# Altium PCB MuMux V1R0.PcbDoc
Units mm, origin at the board's own origin, x right, y up, seen from the top; angles counter-clockwise.
Board outline 60 x 85 mm, 2 copper layers (Top Layer, Bottom Layer); 72 components, 72 nets, 240 pads, 63 vias.
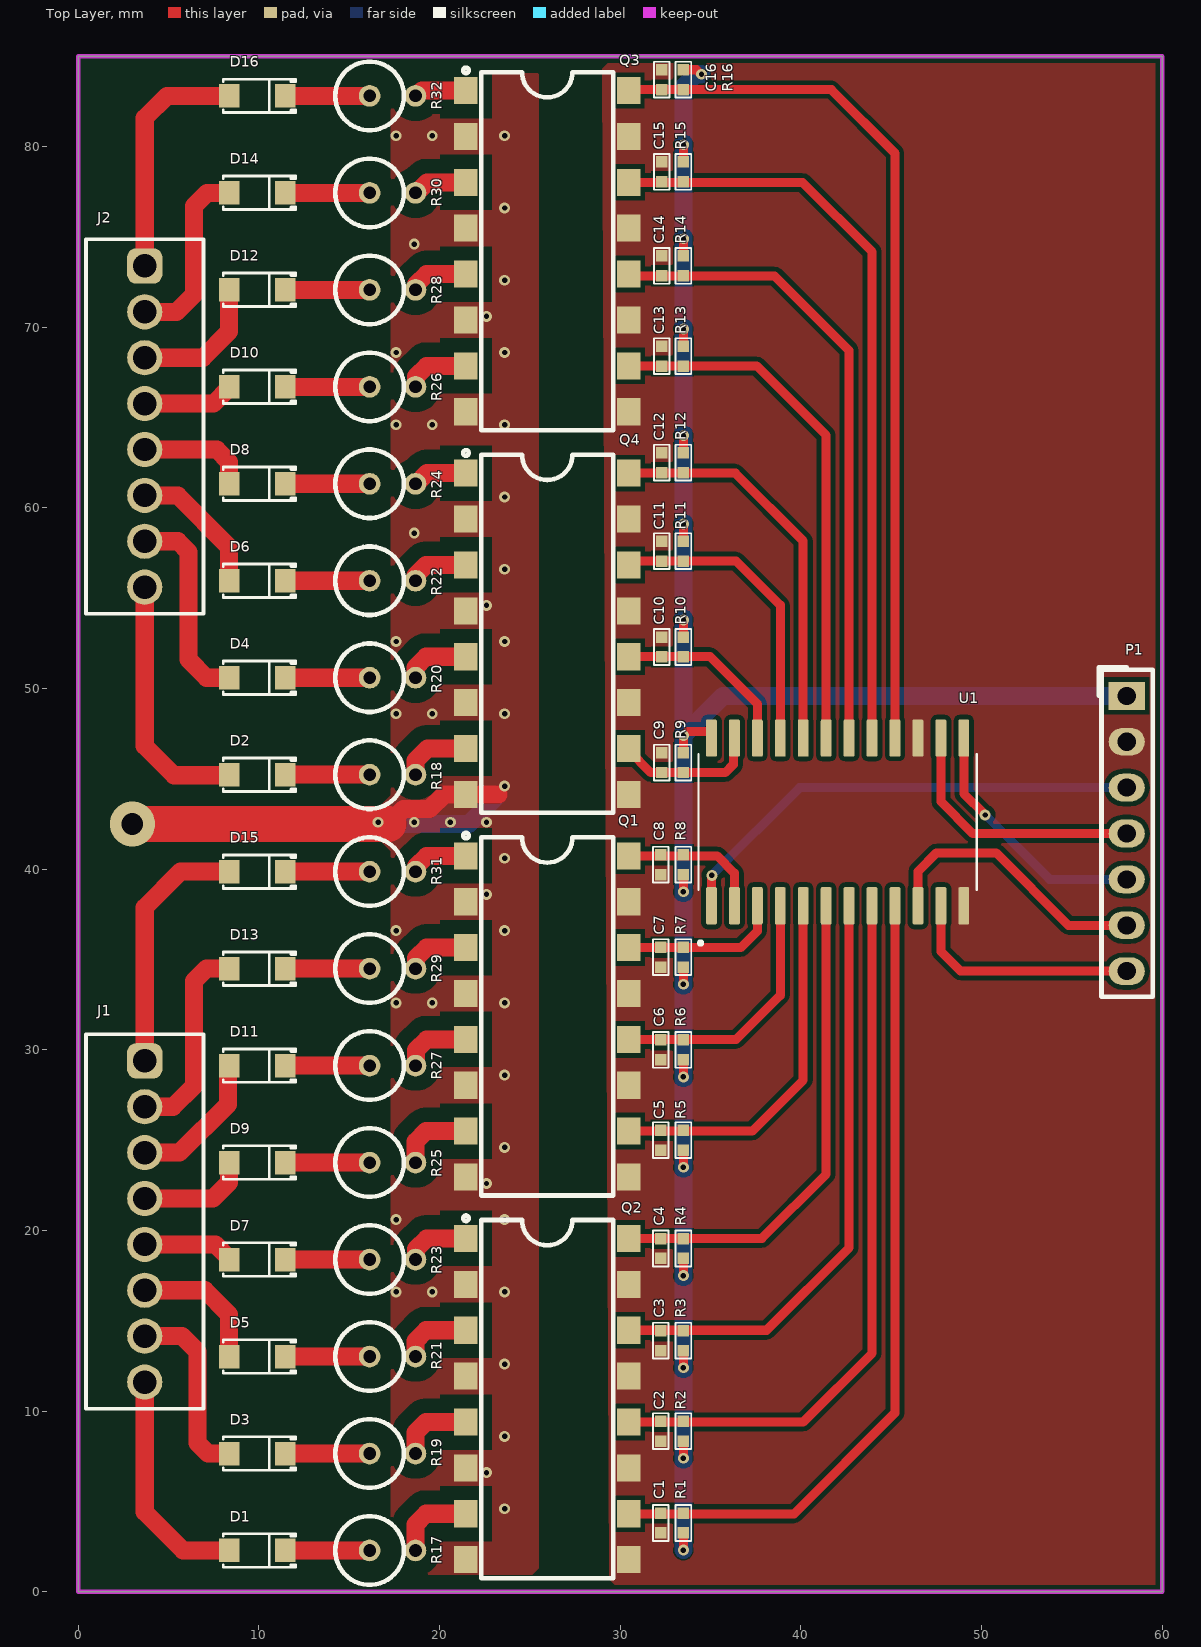
[diagram p0: Top Layer view]
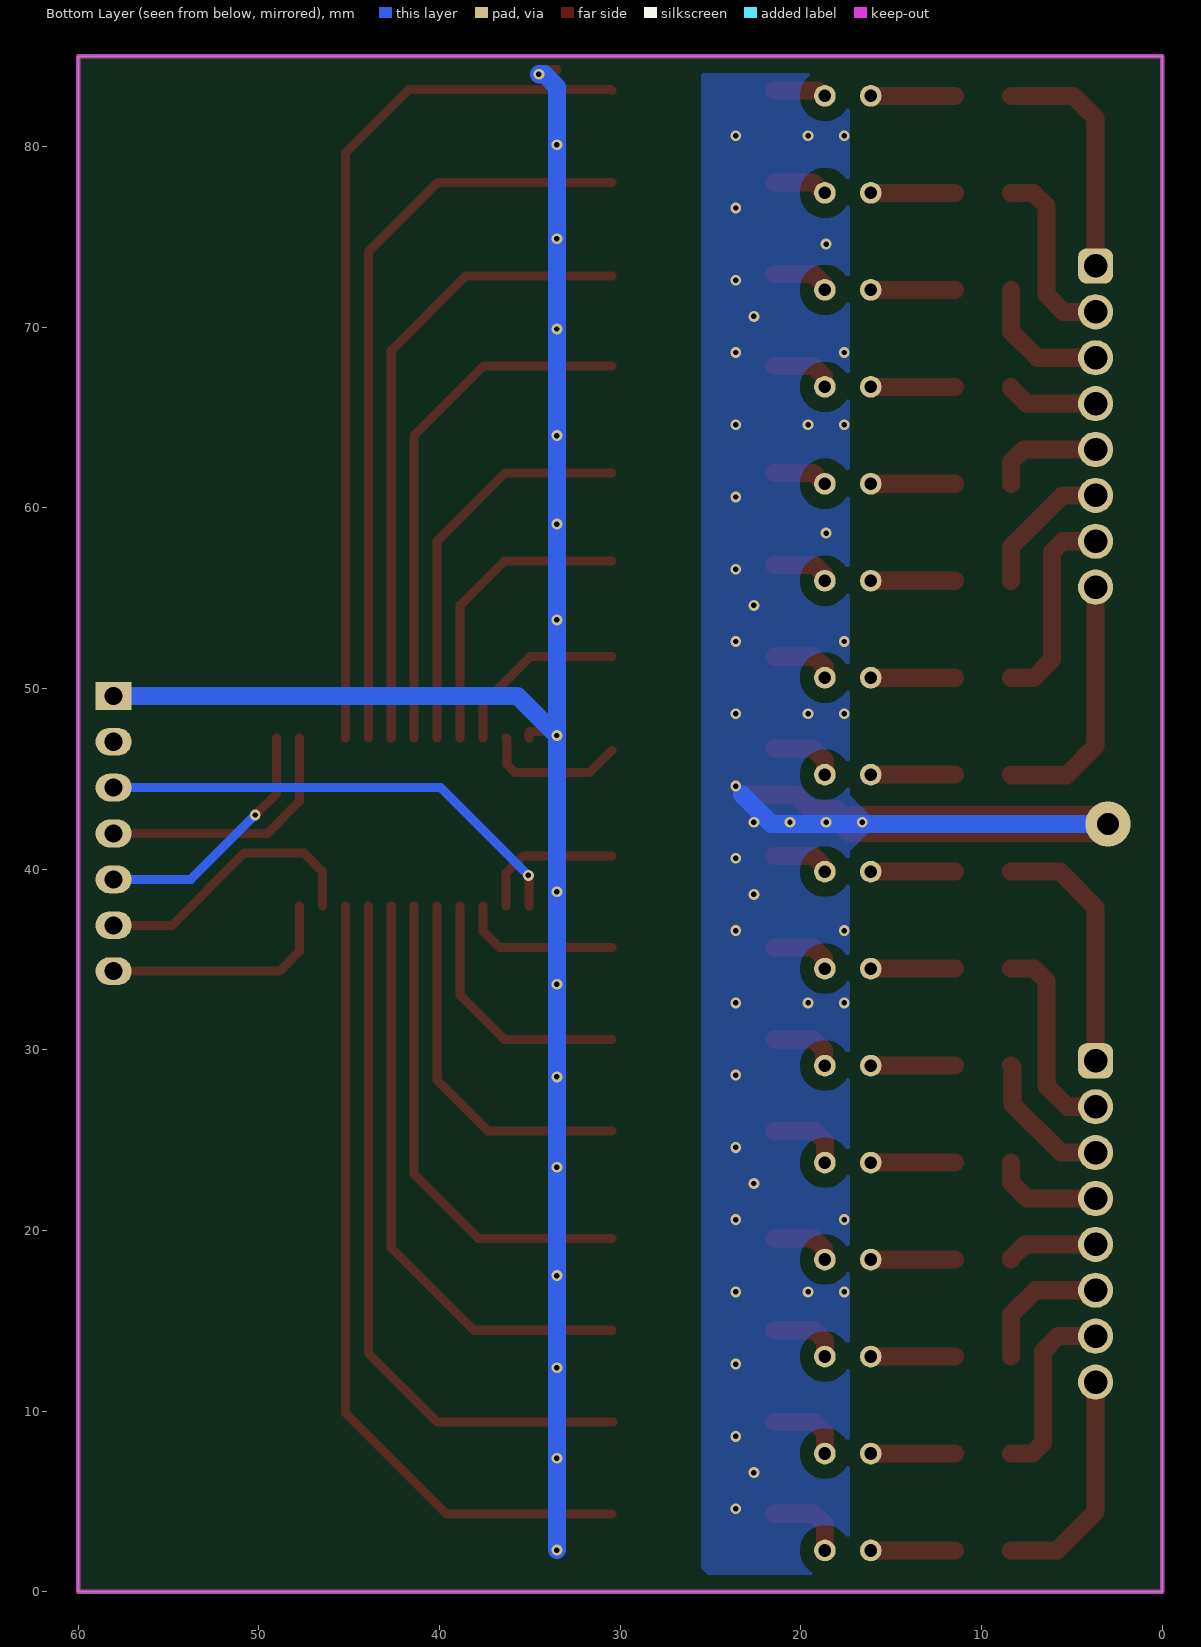
[diagram p1: Bottom Layer view, seen from below]
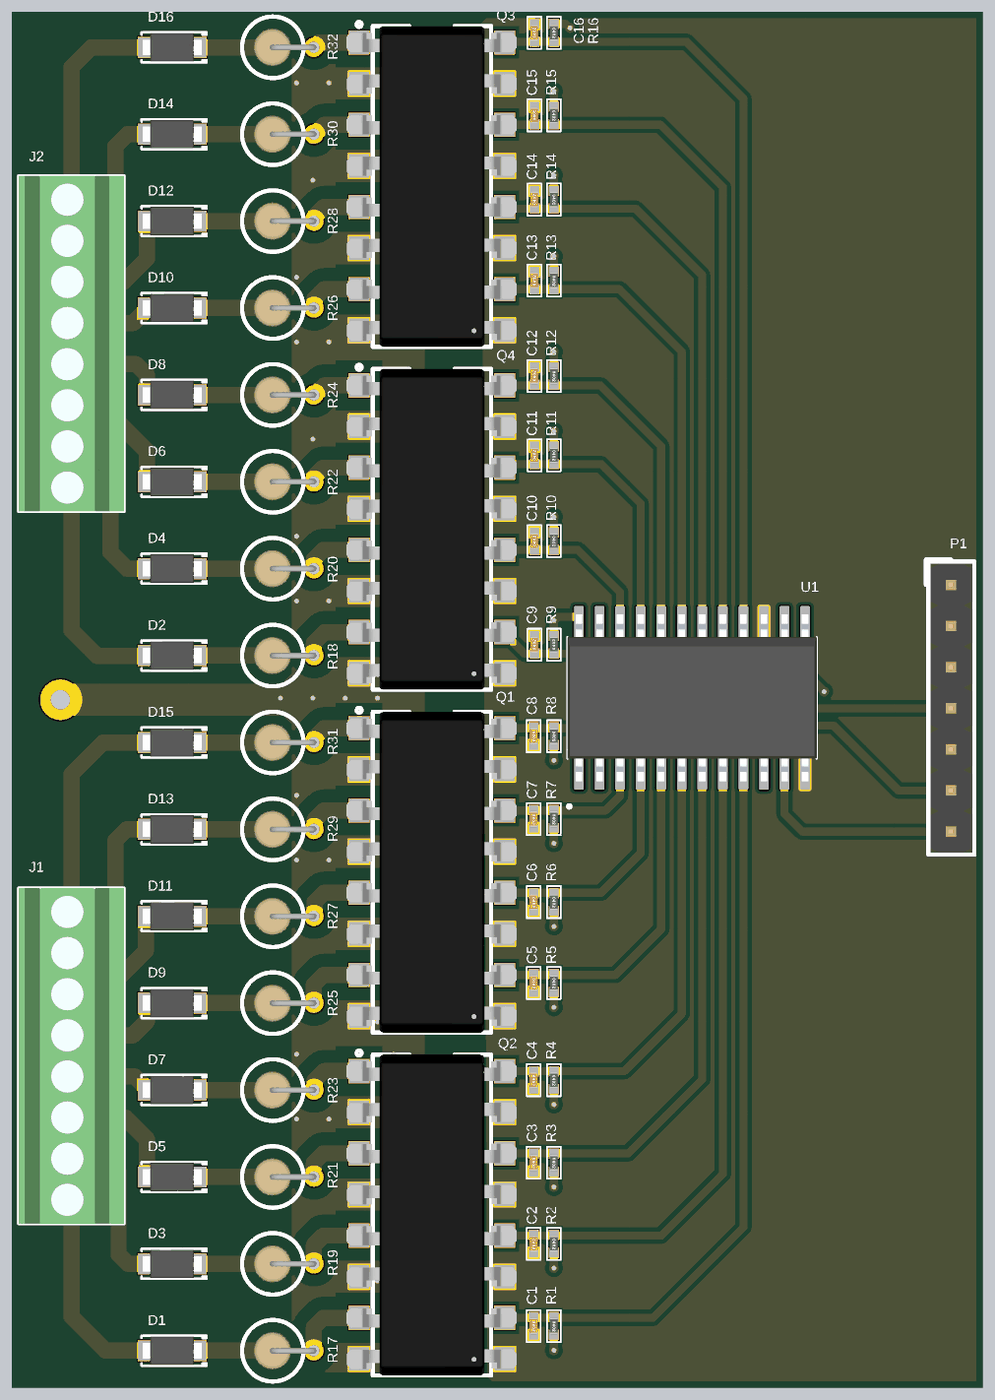
[diagram p2: 3D render of the assembled board from above, using the file's embedded part models]

## Layer stack, top to bottom
Top Solder: solder mask 0.0102, Solder Resist, Dk 3.5
Top Layer: signal copper 0.0356
Dielectric 1: dielectric 0.32, FR-4, Dk 4.8
Bottom Layer: signal copper 0.0356
Bottom Solder: solder mask 0.0102, Solder Resist, Dk 3.5

## Board outline
0,0 0,85 60,85 60,0

## Design rules (kind name [scope] priority, off if disabled: settings)
Clearance Neutral [InNet('NEUTRAL')] p1: gap=0.8 ignorepadtopadclearanceinfootprint=FALSE
Clearance [All] p2: gap=0.254 ignorepadtopadclearanceinfootprint=FALSE
PolygonConnect [All] p1: connectstyle=Direct reliefconductorwidth=0.254 reliefentries=4 polygonreliefangle="90 Angle" airgapwidth=0.254
RoutingVias [All] p1: holewidth=0.711 width=1.27 viastyle="Through Hole" minholewidth=0.711 minwidth=1.27 maxholewidth=0.711 maxwidth=1.27
SilkToSilkClearance [All] p1: silktosilkclearance=0.01
SilkToSolderMaskClearance [IsPad] p1: minsilkscreentomaskgap=0 clearancetoexposedcopper=TRUE
SolderMaskExpansion [All] p1: expansion=0.102 istentingtop=FALSE
SupplyNets "Schematic Supply Nets_2" [InNet('GND')] p1: voltage=0.000
SupplyNets "Schematic Supply Nets_1" [InNet('NEUTRAL')] p2: voltage=0.000
SupplyNets "Schematic Supply Nets" [InNet('+3V3')] p3: voltage=0.000
Width [All] p1: maxlimit=4 minlimit=0.254 preferedwidth=1 minimp=50.000000 maximp=50.000000 favimp=50.000000
28 further rules are at their usual default settings.

## Components (designator, comment, footprint, x,y, rotation, side; value= is the part's Value field where it differs from the comment)
C1 "1uF" 0402-CAP 32.25,3.81 r270 top
C2 "1uF" 0402-CAP 32.25,8.89 r270 top
C3 "1uF" 0402-CAP 32.25,13.9 r270 top
C4 "1uF" 0402-CAP 32.25,19 r270 top
C5 "1uF" 0402-CAP 32.25,25 r270 top
C6 "1uF" 0402-CAP 32.25,30 r270 top
C7 "1uF" 0402-CAP 32.25,35.129 r270 top
C8 "1uF" 0402-CAP 32.25,40.25 r270 top
C9 "1uF" 0402-CAP 32.3,45.9 r90 top
C10 "1uF" 0402-CAP 32.3,52.3 r90 top
C11 "1uF" 0402-CAP 32.3,57.6 r90 top
C12 "1uF" 0402-CAP 32.3,62.5 r90 top
C13 "1uF" 0402-CAP 32.3,68.4 r90 top
C14 "1uF" 0402-CAP 32.3,73.4 r90 top
C15 "1uF" 0402-CAP 32.3,78.6 r90 top
C16 "1uF" 0402-CAP 32.3,83.7 r90 top
D1 "1N4007FLTR" SOD-123F 9.906,2.286 r0 top
D2 "1N4007FLTR" SOD-123F 9.906,45.229 r0 top
D3 "1N4007FLTR" SOD-123F 9.906,7.654 r0 top
D4 "1N4007FLTR" SOD-123F 9.906,50.597 r0 top
D5 "1N4007FLTR" SOD-123F 9.906,13.022 r0 top
D6 "1N4007FLTR" SOD-123F 9.906,55.965 r0 top
D7 "1N4007FLTR" SOD-123F 9.906,18.39 r0 top
D8 "1N4007FLTR" SOD-123F 9.906,61.333 r0 top
D9 "1N4007FLTR" SOD-123F 9.906,23.757 r0 top
D10 "1N4007FLTR" SOD-123F 9.906,66.7 r0 top
D11 "1N4007FLTR" SOD-123F 9.906,29.125 r0 top
D12 "1N4007FLTR" SOD-123F 9.906,72.068 r0 top
D13 "1N4007FLTR" SOD-123F 9.906,34.493 r0 top
D14 "1N4007FLTR" SOD-123F 9.906,77.436 r0 top
D15 "1N4007FLTR" SOD-123F 9.906,39.861 r0 top
D16 "1N4007FLTR" SOD-123F 9.906,82.804 r0 top
J1 "691210910008" 691210910008 3.683,20.5 r270 top
J2 "691210910008" 691210910008 3.683,64.5 r270 top
P1 "M20-9990746" 61300711121 58.039,49.593 r270 top
Q1 "LTV-846S" LTV-846S 25.963,31.849 r270 top locked
Q2 "LTV-846S" LTV-846S 25.963,10.668 r270 top locked
Q3 "LTV-846S" LTV-846S 25.963,74.21 r270 top locked
Q4 "LTV-846S" LTV-846S 25.963,53.03 r270 top locked
R1 "4.7K" 0402-RES 33.5,3.81 r270 top
R2 "4.7K" 0402-RES 33.5,8.89 r270 top
R3 "4.7K" 0402-RES 33.5,13.9 r270 top
R4 "4.7K" 0402-RES 33.5,19 r270 top
R5 "4.7K" 0402-RES 33.5,25 r270 top
R6 "4.7K" 0402-RES 33.5,30 r270 top
R7 "4.7K" 0402-RES 33.5,35.129 r270 top
R8 "4.7K" 0402-RES 33.5,40.25 r270 top
R9 "4.7K" 0402-RES 33.5,45.9 r90 top
R10 "4.7K" 0402-RES 33.5,52.3 r90 top
R11 "4.7K" 0402-RES 33.5,57.6 r90 top
R12 "4.7K" 0402-RES 33.5,62.5 r90 top
R13 "4.7K" 0402-RES 33.5,68.4 r90 top
R14 "4.7K" 0402-RES 33.5,73.4 r90 top
R15 "4.7K" 0402-RES 33.5,78.6 r90 top
R16 "4.7K" 0402-RES 33.5,83.7 r90 top
R17 "100K" FMP200JR-52-100K 16.129,2.286 r0 top
R18 "100K" FMP200JR-52-100K 16.129,45.229 r0 top
R19 "100K" FMP200JR-52-100K 16.129,7.654 r0 top
R20 "100K" FMP200JR-52-100K 16.129,50.597 r0 top
R21 "100K" FMP200JR-52-100K 16.129,13.022 r0 top
R22 "100K" FMP200JR-52-100K 16.129,55.965 r0 top
R23 "100K" FMP200JR-52-100K 16.129,18.39 r0 top
R24 "100K" FMP200JR-52-100K 16.129,61.333 r0 top
R25 "100K" FMP200JR-52-100K 16.129,23.757 r0 top
R26 "100K" FMP200JR-52-100K 16.129,66.7 r0 top
R27 "100K" FMP200JR-52-100K 16.129,29.125 r0 top
R28 "100K" FMP200JR-52-100K 16.129,72.068 r0 top
R29 "100K" FMP200JR-52-100K 16.129,34.493 r0 top
R30 "100K" FMP200JR-52-100K 16.129,77.436 r0 top
R31 "100K" FMP200JR-52-100K 16.129,39.861 r0 top
R32 "100K" FMP200JR-52-100K 16.129,82.804 r0 top
U1 "CD74HC4067" SOIC-24 42.037,42.613 r90 top

## Footprints (in the part's own frame and the unit in brackets; to place one, negate y for a bottom-side part, rotate by r counter-clockwise, add the part's x,y. Pads: shape width x height; smd on the part's side, far side on the other; paste and mask are expansions set on the pad)
0402-CAP [mm]
  rect 0.635x0.635 smd paste-0.03 mask+0.07: 1(-0.55,0) 2(0.55,0)
  silkscreen extent -0.99,-0.43 0.99,0.43, body extent -0.51,-0.25 0.51,0.25, height 0.51
0402-RES [mm]
  rect 0.635x0.635 smd paste-0.03 mask+0.07: 1(-0.55,0) 2(0.55,0)
  silkscreen extent -0.99,-0.43 0.99,0.43, body extent -0.51,-0.25 0.51,0.25, height 0.51
61300711121 [mm] "CONN HEADER 6POS .100 STR TIN"
  rect 1.54x2 hole 1: 1(0,0)
  oval 1.54x2 hole 1: 2(2.54,0) 3(5.08,0) 4(7.62,0) 5(10.16,0) 6(12.7,0) 7(15.24,0)
  silkscreen extent -1.57,-1.55 16.66,1.45, body extent -1.27,-1.27 16.51,1.27, height 8.54
691210910008 [mm] "2,54mm - modular - green - Horizontal wire entry - Cage clamp - 0,8mm2 wires - 08p"
  rrect50% 1.95x1.95 hole 1.3: 1(-8.89,0)
  round 1.95 hole 1.3: 2(-6.35,0) 3(-3.81,0) 4(-1.27,0) 5(1.27,0) 6(3.81,0) 7(6.35,0) 8(8.89,0)
  silkscreen extent -10.36,-3.25 10.36,3.25, body extent -10.36,-3.25 10.36,3.25, height 8.55
FMP200JR-52-100K [mm] "RES 100K OHM 2W 5% AXIAL"
  round 1.2 hole 0.7: 1(0,0) 2(2.54,0)
  silkscreen extent -1.9,-1.9 1.9,1.9, body extent -1.17,-1.15 2.69,1.15, height 8.18
LTV-846S [mm]
  rect 1.5x1.3 smd paste-0.03 mask+0.07: 1(-8.89,-4.5) 2(-6.35,-4.5) 3(-3.81,-4.5) 4(-1.27,-4.5) 5(1.27,-4.5) 6(3.81,-4.5) 7(6.35,-4.5) 8(8.89,-4.5) 9(8.89,4.5) 10(6.35,4.5) 11(3.81,4.5) 12(1.27,4.5) 13(-1.27,4.5) 14(-3.81,4.5) 15(-6.35,4.5) 16(-8.89,4.5)
  silkscreen extent -10.16,-4.65 9.91,3.66, body extent -9.91,-5.27 9.91,5.24, height 3.71
SOD-123F [mm]
  rect 1.15x1.3 smd paste-0.03 mask+0.07: 1(1.55,0) 2(-1.55,0)
  silkscreen extent -1.88,-0.93 2.13,0.93, body extent -1.83,-0.88 1.82,0.87, height 1.05
SOIC-24 [mm]
  rrect25% 2.06x0.6 smd: 1(-4.64,6.985) 2(-4.64,5.715) 3(-4.64,4.445) 4(-4.64,3.175) 5(-4.64,1.905) 6(-4.64,0.635) 7(-4.64,-0.635) 8(-4.64,-1.905) 9(-4.64,-3.175) 10(-4.64,-4.445) 11(-4.64,-5.715) 12(-4.64,-6.985) 13(4.64,-6.985) 14(4.64,-5.715) 15(4.64,-4.445) 16(4.64,-3.175) 17(4.64,-1.905) 18(4.64,-0.635) 19(4.64,0.635) 20(4.64,1.905) 21(4.64,3.175) 22(4.64,4.445) 23(4.64,5.715) 24(4.64,6.985)
  silkscreen extent -6.8,-7.7 3.75,7.7, body extent -5.15,-7.7 5.15,7.7, height 2.65

## Part data
C1 C2 C3 C4 C5 C6 C7 C8 C9 C10 C11 C12 C13 C14 C15 C16: library part GRM155Z71A105KE01J, "CAP CER 1UF 10V X7R 0402", Manufacturer=Murata, Supplier Part Number 1=490-GRM155Z71A105KE01JCT-ND, Category="Ceramic Capacitors", Manufacturer Part Number=GRM155Z71A105KE01J, Pricing 1="1=0,1, 10=0,063, 50=0,0344, 100=0,0281, 500=0,02006, 1000=0,01577, 2500=0,01433, 5000=0,01319 (USD)", RoHS=Yes, Stock 1=272858, Supplier 1=Digi-Key
D1 D2 D3 D4 D5 D6 D7 D8 D9 D10 D11 D12 D13 D14 D15 D16: library part 1N4007FLTR_1, "STANDARD RECTIFIER 1000V SOD-123", Manufacturer 1="Sangdest Microelectronics", Supplier Part Number 1=1655-1N4007FLCT-ND, Manufacturer Part Number 1=1N4007FLTR, Pricing 1="1=0,10000, 10=0,06600, 100=0,03120, 500=0,01848, 1000=0,01214 (USD)", RoHS=No, Stock 1=6969, Supplier 1=Digi-Key
J1 J2: library part CMP-1502-02461-2, NexarPartId=105950654
P1: "CONN HEADER VERT 7POS 2.54MM", Case/Package=SIL, Color=Black, Contact Resistance=30mR, Manufacturer=Harwin, Max Current Rating=3A, Max Operating Temperature=105°C, Min Operating Temperature=-40°C, Package Quantity=1000, Supplier Part Number 1=952-3301-ND, ComponentLink1Description=https://datasheet.ciiva.com/5160/m20-999-351179-5160169.pdf?src-supplier=Mouser, ComponentLink1URL=https://datasheet.ciiva.com/5160/m20-999-351179-5160169.pdf?src-supplier=Mouser, ComponentLink2Description=https://datasheet.ciiva.com/6817/m20-999-6817978.pdf?src-supplier=Digi-Key, ComponentLink2URL=https://datasheet.ciiva.com/6817/m20-999-6817978.pdf?src-supplier=Digi-Key, Connector Type="Male Pin", Contact Material=Brass, Contact Mating Length=0.24inch, Contact Plating=Tin, Depth=2.54mm, Housing Color=Black, Housing Material=Nylon, Length=17.78mm, Manufacturer Part Number=M20-9990746, Mount="Through Hole", Number of Positions=7, Number of Rows=1, Orientation=Straight, Packaging=Bulk, Pitch=2.54mm, Pricing 1="1 = 0,28000, 10 = 0,25900, 100 = 0,17940, 500 = 0,15180, 1000 = 0,12420, 5000 = 0,11040, 10000 = 0,10005 (USD)", RoHS=Yes, Stock 1=1005, Supplier 1=Digi-Key, Termination=Solder
Q1 Q2 Q3 Q4: "OPTOISO 5KV 4CH TRANS 16-SMD", Current - Output / Channel=50mA, Current Transfer Ratio (Max)="600% @ 5mA", Current Transfer Ratio (Min)="50% @ 5mA", Manufacturer="Lite-On Inc.", Operating Temperature="-30°C ~ 100°C", Package / Case="16-SMD, Gull Wing", Supplier Device Package=16-SMD, Supplier Part Number 1=160-1365-5-ND, Voltage - Forward (Vf) (Typ)=1.2V, Voltage - Isolation=5000Vrms, Voltage - Output (Max)=80V, Category=Isolators, ComponentLink1Description=https://media.digikey.com/pdf/Data%20Sheets/Lite-On%20PDFs/LTV-816_826_846.pdf, ComponentLink1URL=https://media.digikey.com/pdf/Data%20Sheets/Lite-On%20PDFs/LTV-816_826_846.pdf, Input Type=DC, Manufacturer Part Number=LTV-846S, Mounting Type="Surface Mount", Output Type=Transistor, Packaging=Tube, Part Status=Active, Pricing 1="1=1.02, 10=0.825, 25=0.6344, 100=0.5711, 250=0.5076, 500=0.43146, 1000=0.35532, 2500=0.33756, 5000=0.32994 (USD)", Rise / Fall Time (Typ)="4µs, 3µs", RoHS="RoHS Compliant", Stock 1=48684, Supplier 1=Digi-Key, Turn On / Turn Off Time (Typ)=-, Vce Saturation (Max)=200mV
R1 R2 R3 R4 R5 R6 R7 R8 R9 R10 R11 R12 R13 R14 R15 R16: library part RMCF0402JT4K70, "RES SMD 4.7K OHM 5% 1/16W 0402", Case Code (Imperial)=0402, Case Code (Metric)=1005, CTA Part Number=101000318, Manufacturer="Stackpole Electronics", Max Operating Temperature=155°C, Max Power Dissipation=63mW, Min Operating Temperature=-55°C, Resistance=4.7kR, Resistor Type="Thick Film", Supplier Part Number 1=RMCF0402JT4K70CT-ND, Temperature Coefficient=100ppm/°C, Tolerance=5%, Case/Package=0402, Category="Chip SMD Resistors", ComponentLink1Description=http://components.arrow.com/part/dataview/50582671S6490608N1174?src-supplier=Arrow+Electronics, ComponentLink1URL=http://components.arrow.com/part/dataview/50582671S6490608N1174?src-supplier=Arrow+Electronics, ComponentLink2Description=https://www.seielect.com/catalog/sei-rmcf_rmcp.pdf?src-supplier=Digi-Key, ComponentLink2URL=https://www.seielect.com/catalog/sei-rmcf_rmcp.pdf?src-supplier=Digi-Key, ComponentLink3Description=https://www.seielect.com/catalog/SEI-RMCF_RMCP.pdf?src-supplier=Avnet, ComponentLink3URL=https://www.seielect.com/catalog/SEI-RMCF_RMCP.pdf?src-supplier=Avnet, Construction=Rectangular, Contact Plating=Tin,Matte, Depth=0.5mm, Features="Automotive AEC-Q200", Height=0.016inch, Lead Free="Lead Free", Length=0.039inch, Manufacturer Part Number=RMCF0402JT4K70, Military Standard=Not, Mount="Surface Mount", Number of Terminations=2, Packaging="Tape and Reel", Power Rating=63mW, Pricing 1="1=0,10000, 10=0,01200, 100=0,00470, 1000=0,00213, 2500=0,00185, 5000=0,00153 (USD)", Radiation Hardening=No, RoHS=Yes, RoHS Compliant=Yes, Series=RMCF, Supplier 1=Digi-Key, Width=0.02inch
R17 R18 R19 R20 R21 R22 R23 R24 R25 R26 R27 R28 R29 R30 R31 R32: library part FMP200JR-52-100K, "RES SMD 100K OHM 2W 5% AXIAL", Manufacturer=Yageo, Operating Temperature="-55°C ~ 155°C", Package / Case=Axial, Power (Watts)=2W, Supplier Part Number 1=100KZTR-ND, Temperature Coefficient=-, Tolerance=±5%, Category=Resistors, ComponentLink1Description=http://www.yageo.com/documents/recent/Yageo%20LR_FMP_2013.pdf, ComponentLink1URL=http://www.yageo.com/documents/recent/Yageo%20LR_FMP_2013.pdf, Composition="Metal Film", Failure Rate=-, Features="Flame Proof, Safety", Height - Seated (Max)=-, Manufacturer Part Number=FMP200JR-52-100K, Packaging="Tape & Reel (TR)", Part Status=Active, Pricing 1="2500=0.02251, 5000=0.02046, 12500=0.0191, 25000=0.01814, 62500=0.01777, 125000=0.01739 (USD)", RoHS="RoHS Compliant", Size / Dimension="0.154\" Dia x 0.354\" L (3.90mm x 9.00mm)", Stock 1=62500, Supplier 1=Digi-Key, Supplier Device Package=Axial
U1: "IC MUX/DEMUX 16X1 24SOIC", Case/Package=SOIC, High Level Output Current=25mA, Manufacturer 1="Texas Instruments", Manufacturer Part  1=CD74HCT4067ME4, Max Operating Temperature=125°C, Max Supply Voltage=5.5V, Min Operating Temperature=-55°C, Min Supply Voltage=4.5V, Nominal Supply Current=8uA, Package Quantity=25, -3db Bandwidth=89MHz, Bandwidth=89MHz, Category="Interface ICs", ComponentLink1Description=https://datasheet.ciiva.com/15092/getdatasheetpartid-517315-15092547.pdf?src-supplier=Verical, ComponentLink1URL=https://datasheet.ciiva.com/15092/getdatasheetpartid-517315-15092547.pdf?src-supplier=Verical, ComponentLink2Description=https://datasheet.ciiva.com/6619/cd4514b-6619129.pdf?src-supplier=Digi-Key, ComponentLink2URL=https://datasheet.ciiva.com/6619/cd4514b-6619129.pdf?src-supplier=Digi-Key, ComponentLink3Description=https://datasheet.ciiva.com/6619/cd4514b-6619130.pdf?src-supplier=Digi-Key, ComponentLink3URL=https://datasheet.ciiva.com/6619/cd4514b-6619130.pdf?src-supplier=Digi-Key, ComponentLink4Description=https://datasheet.ciiva.com/6619/cd4514b-6619131.pdf?src-supplier=Digi-Key, ComponentLink4URL=https://datasheet.ciiva.com/6619/cd4514b-6619131.pdf?src-supplier=Digi-Key, ComponentLink5Description=https://datasheet.ciiva.com/14294/cd4515b-mil-14294557.pdf?src-supplier=Avnet, ComponentLink5URL=https://datasheet.ciiva.com/14294/cd4515b-mil-14294557.pdf?src-supplier=Avnet, ComponentLink6Description=https://datasheet.ciiva.com/28433/cd4515b-mil-28433832.pdf?src-supplier=Avnet+Europe, ComponentLink6URL=https://datasheet.ciiva.com/28433/cd4515b-mil-28433832.pdf?src-supplier=Avnet+Europe, ComponentLink7Description=http://components.arrow.com/part/dataview/41680261S405991N2413?src-supplier=Arrow+Electronics, ComponentLink7URL=http://components.arrow.com/part/dataview/41680261S405991N2413?src-supplier=Arrow+Electronics, ComponentLink8Description=http://www.ti.com/general/docs/suppproductinfo.tsp?distId=10&amp;gotoUrl=http%3A%2F%2Fwww.ti.com%2Flit%2Fgpn%2Fcd74hct4067&src-supplier=Digikey, ComponentLink8URL=http://www.ti.com/general/docs/suppproductinfo.tsp?distId=10&amp;gotoUrl=http%3A%2F%2Fwww.ti.com%2Flit%2Fgpn%2Fcd74hct4067&src-supplier=Digikey, ComponentLink9Description=http://www.ti.com/general/docs/lit/getliterature.tsp?genericPartNumber=CD74HCT4067&&fileType=pdf&src-supplier=Avnet, ComponentLink9URL=http://www.ti.com/general/docs/lit/getliterature.tsp?genericPartNumber=CD74HCT4067&&fileType=pdf&src-supplier=Avnet, ComponentLink10Description=http://www.ti.com/lit/gpn/cd74hct4067?src-supplier=Mouser, ComponentLink10URL=http://www.ti.com/lit/gpn/cd74hct4067?src-supplier=Mouser, Contact Plating=Gold, Lead Free="Lead Free", Low Level Output Current=25mA, Mounting Technology="Surface Mount", Number of Bits=16, Number of Channels=1, Number of Circuits=1, Operating Supply Current=8uA, Packaging=Rail/Tube, Pins=24, Pricing 1="1000=0,4986, 2000=0,4936, 3000=0,4887, 4000=0,4838, 5000=0,479, 10000=0,4742, 20000=0,4694, 25000=0,4647, 50000=0,4601 (USD)", Propagation Delay=15ns, RoHS=Yes, RoHS Compliant=Yes, Series=-, Supplier 1="Arrow Electronics", Supplier Part Number 1=CD74HCT4067ME4, Weight=0.022025oz

## Free pads (board coordinates)
  round 2.5 hole 1.2: 2(3,42.5)

## Via types
v1: diameter 0.6, hole 0.3, Top Layer to Bottom Layer, tented both sides, 63 vias

## Nets (pads, with @x,y where several pads share a name; then routed paths per layer and width w, separated by ;. In a path a pad name is that pad's centre, name@x,y a point inside that pad or via, vN(x,y) a via of type N, cw(c..) or ccw(c..) an arc to the next point about the centre after c; other vN are vias at no path point)
+3V3: P1.1 R1.2 R2.2 R3.2 R4.2 R5.2 R6.2 R7.2 R8.2 R9.2 R10.2 R11.2 R12.2 R13.2 R14.2 R15.2 R16.2 U1.24 | length 125.1
  Top Layer w0.5: v1(33.5,2.31) R1.2 ; v1(33.5,7.39) R2.2 ; v1(33.5,12.4) R3.2 ; v1(33.5,17.5) R4.2 ; v1(33.5,23.5) R5.2 ; v1(33.5,28.5) R6.2 ; v1(33.5,33.629) R7.2 ; v1(33.5,38.75) R8.2 ; R9.2 v1(33.5,47.4) 33.527,47.4 33.755,47.628 35.002,47.628 35.052,47.578 U1.24 ; R10.2 v1(33.5,53.8) ; R11.2 v1(33.5,59.1) ; R12.2 v1(33.5,64) ; R13.2 v1(33.5,69.9) ; R14.2 v1(33.5,74.9) ; R15.2 v1(33.5,80.1) ; R16.2 34.223,84.25 34.473,84 v1(34.5,84)
  Bottom Layer w1: v1(33.5,2.31) v1(33.5,7.39) v1(33.5,12.4) v1(33.5,17.5) v1(33.5,23.5) v1(33.5,28.5) v1(33.5,33.629) v1(33.5,38.75) v1(33.5,47.4) ; v1(34.5,84) 34.2,84 33.5,83.3 v1(33.5,80.1) v1(33.5,74.9) v1(33.5,69.9) v1(33.5,64) v1(33.5,59.1) v1(33.5,53.8) v1(33.5,47.4) ; P1.1 35.693,49.593 34.269,48.169 v1(33.5,47.4)
GND: C1.2 C2.2 C3.2 C4.2 C5.2 C6.2 C7.2 C8.2 C9.2 C10.2 C11.2 C12.2 C13.2 C14.2 C15.2 C16.2 P1.2 Q1.9 Q1.11 Q1.13 Q1.15 Q2.9 Q2.11 Q2.13 Q2.15 Q3.9 Q3.11 Q3.13 Q3.15 Q4.9 Q4.11 Q4.13 Q4.15 U1.12 U1.15
NetC1_1: C1.1 Q2.10 R1.1 U1.9 | length 45.1
  Top Layer w0.5: Q2.10@30.449,4.318 39.624,4.318 45.212,9.906 45.212,20.701 45.212,21.844 45.212,33.02 45.212,34.163 U1.9
NetC2_1: C2.1 Q2.12 R2.1 U1.8 | length 39.9
  Top Layer w0.5: Q2.12@30.391,9.398 33.528,9.398 34.671,9.398 40.132,9.398 43.942,13.208 43.942,25.019 U1.8
NetC3_1: C3.1 Q2.14 R3.1 U1.7 | length 33
  Top Layer w0.5: Q2.14 35,14.478 38.1,14.478 42.672,19.05 U1.7
NetC4_1: C4.1 Q2.16 R4.1 U1.6 | length 27.3
  Top Layer w0.5: Q2.16 37.846,19.558 41.402,23.114 U1.6
NetC5_1: C5.1 Q1.10 R5.1 U1.5 | length 20.5
  Top Layer w0.5: Q1.10 37.31,25.499 40.132,28.321 U1.5
NetC6_1: C6.1 Q1.12 R6.1 U1.4 | length 14.4
  Top Layer w0.5: Q1.12 35,30.579 36.421,30.579 38.862,33.02 U1.4
NetC7_1: C7.1 Q1.14 R7.1 U1.3 | length 8.9
  Top Layer w0.5: Q1.14 32.25,35.659 35,35.659 36.675,35.659 37.592,36.576 U1.3
NetC8_1: C8.1 Q1.16 R8.1 U1.2 | length 8.1
  Top Layer w0.5: Q1.16 32.25,40.739 33.5,40.739 35.361,40.739 36.322,39.778 U1.2
NetC9_1: C9.1 Q4.10 R9.1 U1.23 | length 8
  Top Layer w0.5: Q4.10@30.463,46.58 31.704,45.339 35.814,45.339 36.272,45.797 36.272,47.203 U1.23
NetC10_1: C10.1 Q4.12 R10.1 U1.22 | length 10.1
  Top Layer w0.5: Q4.12 34.981,51.76 37.592,49.149 U1.22
NetC11_1: C11.1 Q4.14 R11.1 U1.21 | length 16.8
  Top Layer w0.5: Q4.14@30.463,57.051 36.421,57.051 38.862,54.61 U1.21
NetC12_1: C12.1 Q4.16 R12.1 U1.20 | length 22.1
  Top Layer w0.5: Q4.16 36.378,61.92 40.132,58.166 U1.20
NetC13_1: C13.1 Q3.10 R13.1 U1.19 | length 29.3
  Top Layer w0.5: Q3.10 37.55,67.86 41.402,64.008 U1.19
NetC14_1: C14.1 Q3.12 R14.1 U1.18 | length 35.4
  Top Layer w0.5: Q3.12@30.463,72.84 38.539,72.84 42.672,68.707 U1.18
NetC15_1: C15.1 Q3.14 R15.1 U1.17 | length 42
  Top Layer w0.5: Q3.14 40.09,78.02 43.942,74.168 U1.17
NetC16_1: C16.1 Q3.16 R16.1 U1.16 | length 48.6
  Top Layer w0.5: Q3.16 30.513,83.15 33.6,83.15 41.691,83.15 45.212,79.629 U1.16
NetD1_1: D1.1 R17.1 | length 4.7
  Top Layer w1: D1.1 R17.1
NetD1_2: D1.2 J1.8 | length 12.7
  Top Layer w1: J1.8 3.683,4.417 5.814,2.286 D1.2
NetD2_1: D2.1 R18.1 | length 4.7
  Top Layer w1: D2.1 R18.1
NetD2_2: D2.2 J2.8 | length 14.1
  Top Layer w1: J2.8 3.683,46.817 5.3,45.2 8.327,45.2 D2.2
NetD3_1: D3.1 R19.1 | length 4.7
  Top Layer w1: D3.1 R19.1
NetD3_2: D3.2 J1.7 | length 10.3
  Top Layer w1: J1.7 5.75,14.15 6.6,13.3 6.6,8.24 7.186,7.654 D3.2
NetD4_1: D4.1 R20.1 | length 4.7
  Top Layer w1: D4.1 R20.1
NetD4_2: D4.2 J2.7 | length 11.3
  Top Layer w1: J2.7 5.514,58.15 6.1,57.564 6.1,51.6 7.103,50.597 D4.2
NetD5_1: D5.1 R21.1 | length 4.7
  Top Layer w1: D5.1 R21.1
NetD5_2: D5.2 J1.6 | length 7.6
  Top Layer w1: J1.6 7.01,16.69 8.356,15.344 D5.2
NetD6_1: D6.1 R22.1 | length 4.7
  Top Layer w1: D6.1 R22.1
NetD6_2: D6.2 J2.6 | length 7.7
  Top Layer w1: J2.6 5.51,60.69 8.356,57.844 D6.2
NetD7_1: D7.1 R23.1 | length 4.7
  Top Layer w1: D7.1 R23.1
NetD7_2: D7.2 J1.5 | length 5.1
  Top Layer w1: J1.5 7.591,19.23 8.356,18.465 D7.2
NetD8_1: D8.1 R24.1 | length 4.7
  Top Layer w1: D8.1 R24.1
NetD8_2: D8.2 J2.5 | length 6.2
  Top Layer w1: J2.5 7.67,63.23 8.356,62.544 D8.2
NetD9_1: D9.1 R25.1 | length 4.7
  Top Layer w1: D9.1 R25.1
NetD9_2: D9.2 J1.4 | length 6.1
  Top Layer w1: J1.4 7.47,21.77 8.356,22.656 D9.2
NetD10_1: D10.1 R26.1 | length 4.7
  Top Layer w1: D10.1 R26.1
NetD10_2: D10.2 J2.4 | length 5.1
  Top Layer w1: J2.4 7.501,65.77 8.356,66.625 D10.2
NetD11_1: D11.1 R27.1 | length 4.7
  Top Layer w1: D11.1 R27.1
NetD11_2: D11.2 J1.3 | length 7.9
  Top Layer w1: J1.3 5.61,24.31 8.281,26.981 8.281,29.05 D11.2
NetD12_1: D12.1 R28.1 | length 4.7
  Top Layer w1: D12.1 R28.1
NetD12_2: D12.2 J2.3 | length 7.6
  Top Layer w1: J2.3 6.91,68.31 8.356,69.756 D12.2
NetD13_1: D13.1 R29.1 | length 4.7
  Top Layer w1: D13.1 R29.1
NetD13_2: D13.2 J1.2 | length 11.2
  Top Layer w1: J1.2 5.25,26.85 6.4,28 6.4,33.8 7.093,34.493 D13.2
NetD14_1: D14.1 R30.1 | length 4.7
  Top Layer w1: D14.1 R30.1
NetD14_2: D14.2 J2.2 | length 10.3
  Top Layer w1: J2.2 5.45,70.85 6.4,71.8 6.4,76.7 7.136,77.436 D14.2
NetD15_1: D15.1 R31.1 | length 4.7
  Top Layer w1: D15.1 R31.1
NetD15_2: D15.2 J1.1 | length 14
  Top Layer w1: J1.1 3.683,37.883 5.661,39.861 D15.2
NetD16_1: D16.1 R32.1 | length 4.7
  Top Layer w1: D16.1 R32.1
NetD16_2: D16.2 J2.1 | length 13.4
  Top Layer w1: J2.1 3.683,81.583 4.904,82.804 D16.2
NetP1_3: P1.3 U1.1 | length 26.7
  Top Layer w0.5: U1.1 35.052,39.602 35.077,39.628 v1(35.077,39.655)
  Bottom Layer w0.5: v1(35.077,39.655) 39.935,44.513 P1.3
NetP1_4: P1.4 U1.14 | length 14.5
  Top Layer w0.5: U1.14 47.752,43.748 49.527,41.973 P1.4
NetP1_5: P1.5 U1.13 | length 14.1
  Top Layer w0.5: U1.13 49.022,44.178 v1(50.2,43)
  Bottom Layer w0.5: v1(50.2,43) 53.767,39.433 P1.5
NetP1_6: P1.6 U1.10 | length 15.5
  Top Layer w0.5: U1.10 46.482,39.868 47.51,40.896 50.804,40.896 54.807,36.893 P1.6
NetP1_7: P1.7 U1.11 | length 13.3
  Top Layer w0.5: U1.11 47.752,35.448 48.847,34.353 P1.7
NetQ1_1: Q1.1 R31.2 | length 3.3
  Top Layer w1: R31.2 18.707,39.899 18.707,40.153 19.293,40.739 Q1.1
NetQ1_3: Q1.3 R29.2 | length 3.6
  Top Layer w1: R29.2 18.707,34.531 18.707,35.073 19.293,35.659 Q1.3
NetQ1_5: Q1.5 R27.2 | length 3.9
  Top Layer w1: R27.2 18.707,29.164 18.707,29.993 19.293,30.579 Q1.5
NetQ1_7: Q1.7 R25.2 | length 4.2
  Top Layer w1: R25.2 18.669,24.913 19.255,25.499 Q1.7
NetQ2_1: Q2.1 R23.2 | length 3.6
  Top Layer w1: R23.2 18.707,18.428 18.707,18.972 19.293,19.558 Q2.1
NetQ2_3: Q2.3 R21.2 | length 3.9
  Top Layer w1: R21.2 18.669,13.892 19.255,14.478 Q2.3
NetQ2_5: Q2.5 R19.2 | length 4.2
  Top Layer w1: R19.2 18.669,8.812 19.255,9.398 Q2.5
NetQ2_7: Q2.7 R17.2 | length 4.5
  Top Layer w1: R17.2 18.669,3.732 19.255,4.318 Q2.7
NetQ3_1: Q3.1 R32.2 | length 2.9
  Top Layer w1: R32.2 18.723,82.804 19.019,83.1 Q3.1
NetQ3_3: Q3.3 R30.2 | length 3
  Top Layer w1: R30.2 18.723,77.436 19.307,78.02 Q3.3
NetQ3_5: Q3.5 R28.2 | length 3.3
  Top Layer w1: R28.2 18.707,72.107 18.707,72.355 19.293,72.94 Q3.5
NetQ3_7: Q3.7 R26.2 | length 3.6
  Top Layer w1: R26.2 18.707,66.739 18.707,67.275 19.293,67.86 Q3.7
NetQ4_1: Q4.1 R24.2 | length 3
  Top Layer w1: R24.2 18.723,61.333 19.31,61.92 Q4.1
NetQ4_3: Q4.3 R22.2 | length 3.3
  Top Layer w1: R22.2 18.669,56.254 19.255,56.84 Q4.3
NetQ4_5: Q4.5 R20.2 | length 3.6
  Top Layer w1: R20.2 18.669,51.169 19.26,51.76 Q4.5
NetQ4_7: Q4.7 R18.2 | length 3.9
  Top Layer w1: R18.2 18.669,46.014 19.334,46.68 Q4.7
NEUTRAL: pad.2 Q1.2 Q1.4 Q1.6 Q1.8 Q2.2 Q2.4 Q2.6 Q2.8 Q3.2 Q3.4 Q3.6 Q3.8 Q4.2 Q4.4 Q4.6 Q4.8 | length 41.9
  Top Layer w1: 17.181,42.5 18.01,43.329 19.456,43.329 20.267,44.14 23.26,44.14
  Top Layer w2: pad.2 17.181,42.5
  Bottom Layer w1: pad.2 21.621,42.5 23.26,44.14
  other v1: 23.6,4.6 22.6,6.6 23.6,8.6 23.6,12.6 17.6,16.6 19.6,16.6 23.6,16.6 17.6,20.6 23.6,20.6 22.6,22.6 23.6,24.6 23.6,28.6 17.6,32.6 19.6,32.6 23.6,32.6 17.6,36.6 23.6,36.6 22.6,38.6 23.6,40.6 16.6,42.6 18.6,42.6 20.6,42.6 22.6,42.6 23.6,44.6 17.6,48.6 19.6,48.6 23.6,48.6 17.6,52.6 23.6,52.6 22.6,54.6 23.6,56.6 18.6,58.6 23.6,60.6 17.6,64.6 19.6,64.6 23.6,64.6 17.6,68.6 23.6,68.6 22.6,70.6 23.6,72.6 18.6,74.6 23.6,76.6 17.6,80.6 19.6,80.6 23.6,80.6

## Polygon pours and split planes (outlines as drawn)
GND on Top Layer "NONET_L04_P-001" (solid, pour order 2): 29,84.3 29.6,84.9 60,84.9 60,0 30.1,0 29.4,0.7 29.4,0.8
NEUTRAL on Top Layer "NONET_L04_P-001" (solid, pour order 1): 17.3,44.1 16,42.8 16,42.3 17.3,41 17.3,1.2 18.1,0.4 24.6,0.4 25.5,1.3 25.5,84 24.7,84.8 18.538,84.8 17.3,83.562
NEUTRAL on Bottom Layer "NONET_L04_P-001" (solid, pour order 0): 17.3,44.1 16,42.8 16,42.3 17.3,41 17.3,1.2 18.1,0.4 24.6,0.4 25.5,1.3 25.5,84 24.7,84.8 18.538,84.8 17.3,83.562

## Keep-outs
Keep-Out Layer:
  the board outline again, w0.254

## Silkscreen, mask and mechanical layers (free items; w line width, h text height)
Top Component Outline:
  the board outline again, w0.254